# Altium PCB ICEBoard_rev1.0.PcbDoc
Units mil, origin at the board's own origin, x right, y up, seen from the top; angles counter-clockwise.
Board outline 4748.03 x 3751.97 mil, 2 copper layers (Top Layer, Bottom Layer); 41 components, 34 nets, 176 pads, 27 vias.
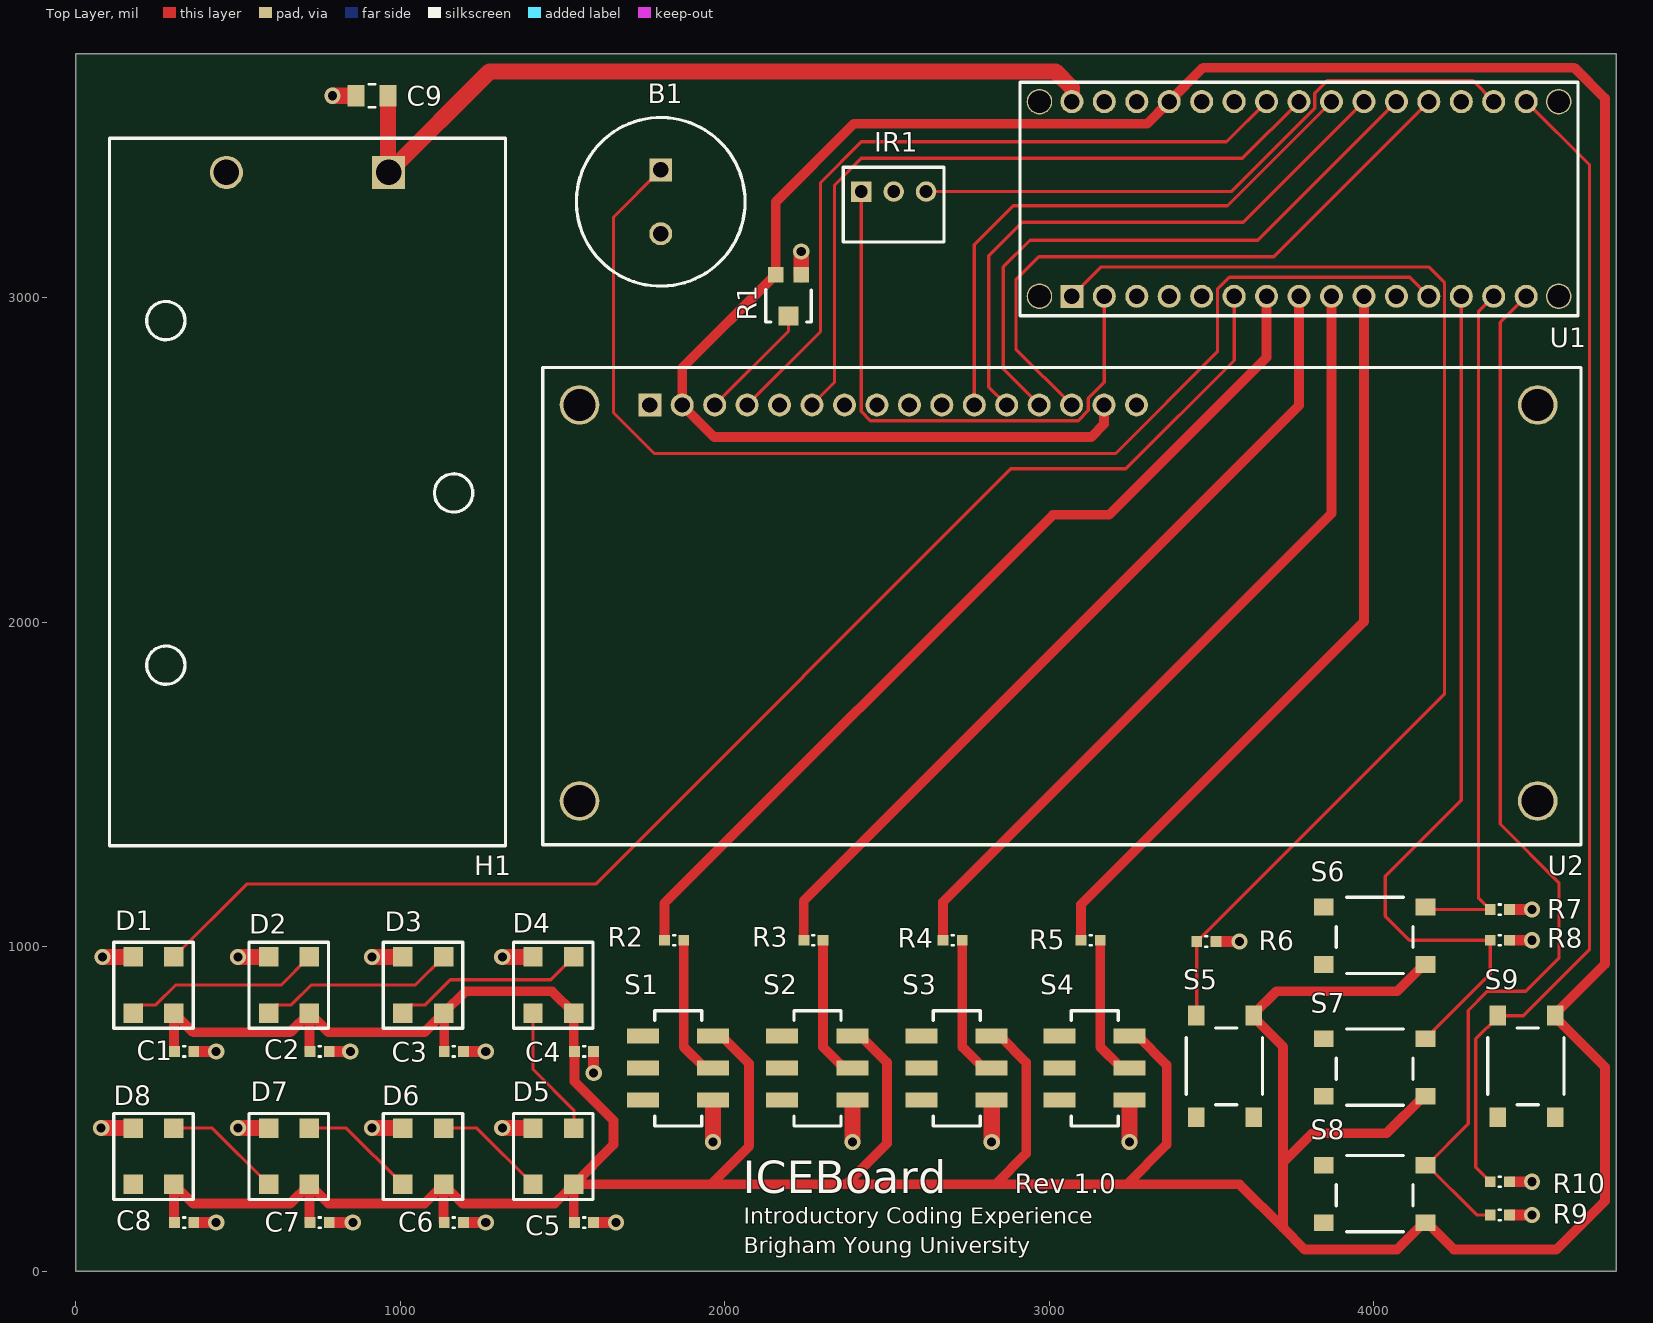
[diagram p0: Top Layer view]
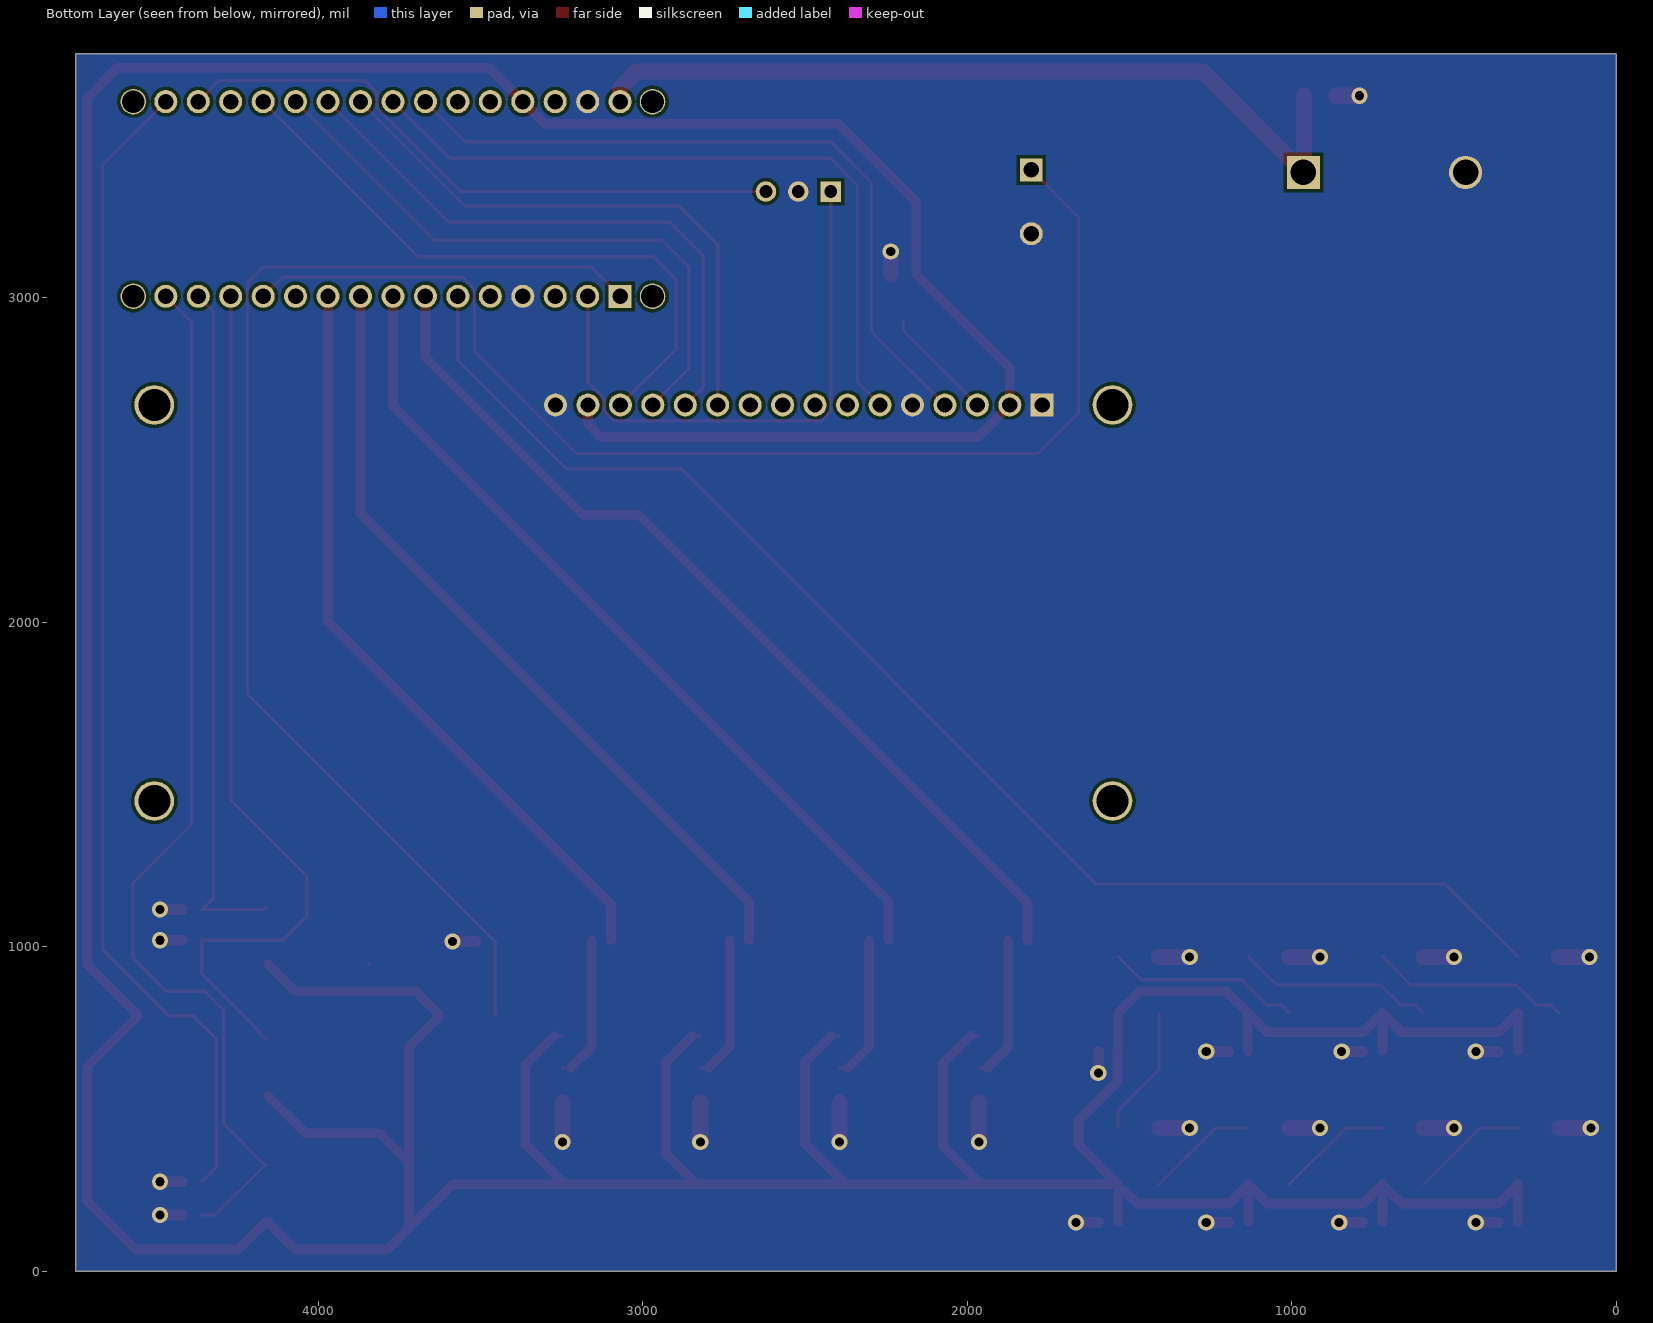
[diagram p1: Bottom Layer view, seen from below]

## Layer stack, top to bottom
Top Solder: solder mask 0.4, Solder Resist, Dk 3.5
Top Layer: signal copper 1.4
Dielectric 1: dielectric 12.6, FR-4, Dk 4.8
Bottom Layer: signal copper 1.4
Bottom Solder: solder mask 0.4, Solder Resist, Dk 3.5

## Board outline
0,0 4748.03,0 4748.03,3751.97 0,3751.97

## Design rules (kind name [scope] priority, off if disabled: settings)
Clearance [All] p1: gap=10 ignorepadtopadclearanceinfootprint=FALSE except(0: Arc-Hole Track-Hole SMDPad-Hole THPad-Hole Via-Hole Fill-Hole Poly-Hole Region-Hole Text-Hole; 8: Arc-THPad Track-THPad)
PolygonConnect [All] p1: connectstyle=Direct reliefconductorwidth=10 reliefentries=4 polygonreliefangle="90 Angle" airgapwidth=10
RoutingVias [All] p1: holewidth=28 width=50 viastyle="Through Hole" minholewidth=28 minwidth=50 maxholewidth=28 maxwidth=50
SolderMaskExpansion [All] p1: expansion=4
UnRoutedNet [All] p1: checkbadconnections=TRUE
Width [All] p1: maxlimit=50 minlimit=10 preferedwidth=10 minimp=50.000000 maximp=50.000000 favimp=50.000000
29 further rules are at their usual default settings.

## Components (designator, comment, footprint, x,y, rotation, side; value= is the part's Value field where it differs from the comment)
B1 "Buzzer" TP124005 1803.15,3393.7 r0 top
C1 "0.1u" CAPACITOR 334.65,677.17 r0 top
C2 "0.1u" CAPACITOR 751.97,677.17 r0 top
C3 "0.1u" CAPACITOR 1165.35,677.17 r0 top
C4 "0.1u" CAPACITOR 1566.93,677.17 r0 top
C5 "0.1u" CAPACITOR 1566.93,149.61 r0 top
C6 "0.1u" CAPACITOR 1165.35,149.61 r0 top
C7 "0.1u" CAPACITOR 751.97,149.61 r0 top
C8 "0.1u" CAPACITOR 334.65,149.61 r0 top
C9 "10u" PCBComponent_1 913.39,3622.05 r180 top
D1 "NeoPixel" NEOPIXEL 177.17,968.5 r270 top
D2 "NeoPixel" NEOPIXEL 594.49,968.5 r270 top
D3 "NeoPixel" NEOPIXEL 1007.87,968.5 r270 top
D4 "NeoPixel" NEOPIXEL 1409.45,968.5 r270 top
D5 "NeoPixel" NEOPIXEL 1409.45,440.94 r270 top
D6 "NeoPixel" NEOPIXEL 1007.87,440.94 r270 top
D7 "NeoPixel" NEOPIXEL 594.49,440.94 r270 top
D8 "NeoPixel" NEOPIXEL 177.17,440.94 r270 top
H1 "Battery Holder" BH9VPC 964.57,3385.83 r90 top
IR1 "IR Receiver" TSOP382 2420.87,3326.77 r90 top
R1 "10k" TC33X 2196.85,3000 r180 top
R2 "100" Resistor1608 1844.49,1019.68 r0 top
R3 "100" Resistor1608 2273.62,1019.68 r0 top
R4 "100" Resistor1608 2702.76,1019.68 r0 top
R5 "100" Resistor1608 3127.95,1019.68 r0 top
R6 "10k" Resistor1608 3484.25,1015.75 r180 top
R7 "10k" Resistor1608 4388.78,1114.17 r180 top
R8 "10k" Resistor1608 4388.78,1019.69 r180 top
R9 "10k" Resistor1608 4388.78,173.23 r180 top
R10 "10k" Resistor1608 4388.78,275.59 r180 top
S1 "Slide Switch" JS202011SCQN 1964.57,527.56 r90 top
S2 "Slide Switch" JS202011SCQN 2393.7,527.56 r90 top
S3 "Slide Switch" JS202011SCQN 2822.83,527.56 r90 top
S4 "Slide Switch" JS202011SCQN 3248.03,527.56 r90 top
S5 "Tactile Switch" PTS645 3452.76,474.41 r90 top
S6 "Tactile Switch" PTS645 3846.46,1122.05 r0 top
S7 "Tactile Switch" PTS645 3846.46,716.54 r0 top
S8 "Tactile Switch" PTS645 3846.46,326.77 r0 top
S9 "Tactile Switch" PTS645 4381.89,474.41 r90 top
U1 "Arduino Nano" ARDUINONANO 3070.08,3003.94 r0 top
U2 "LCD Screen" TC1602A-01T 1769.29,2669.29 r0 top

## Footprints (in the part's own frame and the unit in brackets; to place one, negate y for a bottom-side part, rotate by r counter-clockwise, add the part's x,y. Pads: shape width x height; smd on the part's side, far side on the other; paste and mask are expansions set on the pad)
ARDUINONANO [mm]
  rect 1.8x1.8 hole 1.2: 1(0,0)
  round 1.8 hole 1.2: 2(2.54,0) 3(5.08,0) 4(7.62,0) 5(10.16,0) 6(12.7,0) 7(15.24,0) 8(17.78,0) 9(20.32,0) 10(22.86,0) 11(25.4,0) 12(27.94,0) 13(30.48,0) 14(33.02,0) 15(35.56,0) 16(35.56,15.24) 17(33.02,15.24) 18(30.48,15.24) 19(27.94,15.24) 20(25.4,15.24) 21(22.86,15.24) 22(20.32,15.24) 23(17.78,15.24) 24(15.24,15.24) 25(12.7,15.24) 26(10.16,15.24) 27(7.62,15.24) 28(5.08,15.24) 29(2.54,15.24) 30(0,15.24)
  round 2 hole 1.778: 31(-2.54,15.24) 32(38.1,15.24) 33(38.1,0) 34(-2.54,0)
  silkscreen extent -4.06,-1.52 39.62,16.76, body extent -3.81,-1.14 41.27,16.45, height 8
BH9VPC [mm]
  rect 2.6x2.6 hole 2: 1(0,0)
  round 2.6 hole 2: 2(0,12.7)
  silkscreen extent -52.7,-9.14 2.67,21.84, body extent -52.12,-8.64 2.22,21.34, height 20.62
CAPACITOR [mm]
  rect 0.85x0.85 smd: 1(-0.75,0) 2(0.75,0)
  silkscreen extent -0.08,-0.4 0.08,0.4, body extent -0.85,-0.45 0.85,0.45, height 0.9
JS202011SCQN [mm]
  rect 1.2x2.5 smd: 1(0,0) 2(2.5,0) 3(5,0) 4(0,5.5) 5(2.5,5.5) 6(5,5.5)
  silkscreen extent -2.03,0.89 6.98,4.57, body extent -2,0.95 7,4.55, height 5.5
NEOPIXEL [mil]
  rect 60x60 smd: 1(0,0) 2(0,125.98) 3(173.23,125.98) 4(173.23,0)
  silkscreen extent -45,-60 220,185, body extent -10,-35 185,160, height 63
PCBComponent_1 [mm]
  rect 1.3x1.65 smd: 1(-1.25,0) 2(1.25,0)
  silkscreen extent -0.25,-0.89 0.25,0.89, body extent -1.05,-0.67 1.05,0.68, height 1.35
PTS645 [mm]
  rect 1.55x1.3 smd: 1(0,0) 2(7.95,0) 3(0,-4.5) 4(7.95,-4.5)
  silkscreen extent 0.97,-5.21 6.98,0.76, body extent 0.97,-5.25 6.98,0.75, height 4.3
Resistor1608 [mm]
  rect 0.85x0.85 smd: 1(-0.75,0) 2(0.75,0)
  silkscreen extent -0.08,-0.4 0.08,0.4, body extent -0.8,-0.4 0.8,0.4, height 0.45
TC33X [mm]
  rect 1.2x1.2 smd: 1(-1,-1.8) 3(1,-1.8)
  rect 1.6x1.5 smd: 2(0,1.45)
  silkscreen extent -1.78,-0.63 1.78,1.91, body extent -1.8,-1.91 1.8,2.05, height 1.13
TC1602A-01T [mm]
  rect 1.8x1.8 hole 1.2: 1(0,0)
  round 1.8 hole 1.2: 2(2.54,0) 3(5.08,0) 4(7.62,0) 5(10.16,0) 6(12.7,0) 7(15.24,0) 8(17.78,0) 9(20.32,0) 10(22.86,0) 11(25.4,0) 12(27.94,0) 13(30.48,0) 14(33.02,0) 15(35.56,0) 16(38.1,0)
  round 3.1 hole 2.5: 17(-5.5,0) 18(69.5,0) 19(69.5,-31) 20(-5.5,-31)
  silkscreen extent -8.38,-34.42 72.9,2.92, body extent -8,-34 72.5,2.5, height 13.5
TP124005 [mm]
  rect 1.8x1.8 hole 1.2: 1(0,0)
  round 1.8 hole 1.2: 2(0,-5)
  silkscreen extent -6.6,-9.1 6.6,4.1, body extent -6.2,-8.7 6.2,3.7, height 7.3
TSOP382 [mm]
  rect 1.6x1.6 hole 1: 1(0,0)
  round 1.6 hole 1: 2(0,-2.54) 3(0,-5.08)
  silkscreen extent -3.94,-6.48 1.91,1.4, body extent -3.4,-5.04 1.4,-0.04, height 8.55

## Part data
B1: library part TP124005
C1 C2 C3 C4 C5 C6 C7 C8 C9: library part Capacitor
H1: library part BH9VPC
IR1: library part TSOP382
R1: library part "Resistor - Variable"
R2 R3 R4 R5 R6 R7 R8 R9 R10: library part Resistor
S1 S2 S3 S4: library part JS202011SCQN
S5 S6 S7 S8 S9: library part PTS645
U1: library part ArduinoNano
U2: library part TC1602A-01T

## Via types
v1: diameter 50, hole 28, Top Layer to Bottom Layer, 27 vias

## Nets (pads, with @x,y where several pads share a name; then routed paths per layer and width w, separated by ;. In a path a pad name is that pad's centre, name@x,y a point inside that pad or via, vN(x,y) a via of type N, cw(c..) or ccw(c..) an arc to the next point about the centre after c; other vN are vias at no path point)
+9: C9.1 H1.1 U1.30 | length 2534.8
  Top Layer w10: H1.1@962.6,3387.8 H1.1
  Top Layer w50: H1.1@962.6,3387.8 C9.1 ; H1.1 1275.59,3696.85 3019.69,3696.85 3070.08,3646.46 U1.30
GND: B1.2 C1.2 C2.2 C3.2 C4.2 C5.2 C6.2 C7.2 C8.2 C9.2 D1.1 D2.1 D3.1 D4.1 D5.1 D6.1 D7.1 D8.1 H1.2 IR1.2 R1.1 R6.1 R7.1 R8.1 R9.1 R10.1 S1.1 S2.1 S3.1 S4.1 U1.4 U1.29 U2.1 U2.5 U2.16 | length 2316
  Top Layer w10: D4.1@1405.51,972.44 D4.1 ; S1.1@1964.57,519.68 S1.1 ; S4.1@3248.03,519.68 S4.1 ; R7.1@4417.32,1115.16 R7.1
  Top Layer w33.46: C8.2 v1(433.07,149.61) ; C1.2 v1(433.07,677.17) ; C7.2 v1(854.33,149.61) ; C2.2 v1(846.46,677.17) ; C6.2 v1(1263.78,149.61) ; C3.2 v1(1263.78,677.17) ; C5.2 v1(1665.35,149.61) ; v1(1596.46,610.24) C4.2 ; R6.1 v1(3586.61,1015.75) ; R9.1 v1(4488.19,173.23) ; R10.1 v1(4488.19,275.59) ; R8.1 v1(4488.19,1019.68) ; R7.1 v1(4488.19,1114.17)
  Top Layer w47.24: R1.1 v1(2236.22,3141.73)
  Top Layer w50: v1(78.74,440.94) D8.1 ; v1(82.68,968.5) D1.1 ; v1(500,440.94) D7.1 ; v1(500,968.5) D2.1 ; v1(791.34,3622.05) C9.2 ; v1(913.39,440.94) D6.1 ; v1(913.39,968.5) D3.1 ; v1(1314.96,440.94) D5.1 ; v1(1314.96,968.5) D4.1 ; v1(1964.57,397.64) S1.1@1964.57,519.68 ; v1(2393.7,397.64) S2.1@2393.7,519.68 ; v1(2822.83,397.64) S3.1@2822.83,519.68 ; v1(3248.02,397.64) S4.1@3248.02,519.68
NetB1_1: B1.1 U1.12 | length 3735.5
  Top Layer w10: B1.1 1657.48,3248.03 1657.48,2645.67 1783.46,2519.68 3204.72,2519.68 3518.51,2833.47 3518.51,3026.07 3555.43,3062.99 4111.02,3062.99 U1.12
NetC1_1: C1.1 C2.1 C3.1 C4.1 C5.1 C6.1 C7.1 C8.1 D1.3 D2.3 D3.3 D4.3 D5.3 D6.3 D7.3 D8.3 R1.3 S1.3 S2.3 S3.3 S4.3 S5.4 S6.4 S7.4 S8.4 S9.4 U1.27 U2.2 U2.15 | length 20141.4
  Top Layer w10: C8.1@303.15,151.57 C8.1 C8.1@309.65,154.13 ; C1.1@303.15,679.13 C1.1 ; C2.1@720.47,679.13 C2.1 ; C6.1@1133.86,151.57 C6.1 ; D3.3 D3.3@1135.83,793.31 ; D5.3@1513.78,246.06 D5.3 ; C5.1@1535.43,151.57 C5.1 ; C4.1@1535.43,679.13 C4.1 ; 1960.63,267.72 1960.63,270.39 ; S1.3 S1.3@1990.16,724.41 ; S2.3 S2.3@2419.29,724.41 ; S3.3 S3.3@2848.43,724.41 ; S4.3 S4.3@3273.62,724.41 ; S8.4@4154.53,149.61 S8.4 S8.4@4164.37,149.61 ; S7.4@4154.53,539.37 S7.4 ; S6.4@4154.53,944.88 S6.4 ; S9.4@4559.06,782.48 S9.4 S9.4@4559.06,792.32
  Top Layer w30: C8.1@303.15,151.57 D8.3 362.2,208.66 661.42,208.66 D7.3 ; C1.1@303.15,679.13 D1.3 362.2,736.22 661.42,736.22 D2.3 ; C7.1@720.47,151.57 D7.3 ; C2.1@720.47,679.13 D2.3 ; C6.1@1133.86,151.57 D6.3 ; C3.1 D3.3@1135.83,793.31 ; D5.3@1513.78,246.06 1476.38,208.66 1192.91,208.66 D6.3 ; C5.1@1535.43,151.57 D5.3 ; C4.1@1535.43,679.13 D4.3 1468.5,862.2 1200.79,862.2 D3.3 1074.8,736.22 779.53,736.22 D2.3 ; C4.1 1537.4,584.65 1657.48,464.57 1657.48,389.76 D5.3 ; 1960.63,270.39 2074.8,384.57 2074.8,639.76 S1.3@1990.16,724.41 ; S2.3@2419.29,724.41 2500,643.7 2500,393.7 2374.02,267.72 ; S3.3@2848.43,724.41 2929.13,643.7 2929.13,362.2 2834.65,267.72 ; U2.15 3169.29,2610.24 3129.92,2570.87 1967.72,2570.87 U2.2 1869.29,2782.68 R1.3 2157.48,3295.28 2397.64,3535.43 3301.57,3535.43 U1.27 3474.8,3708.66 4618.11,3708.66 4712.6,3614.17 4712.6,945.87 S9.4@4559.06,792.32 ; S4.3@3273.62,724.41 3362.2,635.83 3362.2,389.76 3240.16,267.72 ; S8.4@4154.53,149.61 4071.85,66.93 3787.4,66.93 3720.47,133.86 ; S7.4@4154.53,539.37 4040.35,425.2 3811.02,425.2 3720.47,334.65 ; S6.4@4154.53,944.88 4071.85,862.2 3699.8,862.2 3629.92,792.32 S5.4 3629.92,782.48 3720.47,691.93 3720.47,334.65 ; S8.4@4164.37,149.61 4247.05,66.93 4562.99,66.93 4712.6,216.54 4712.6,628.94 S9.4@4559.06,782.48 ; D7.3 779.53,208.66 1074.8,208.66 D6.3 ; D5.3 1960.63,267.72 2374.02,267.72 ; 2374.02,267.72 2834.65,267.72 ; 2834.65,267.72 3240.16,267.72 ; 3240.16,267.72 3586.61,267.72 3720.47,133.86 ; 3720.47,133.86 3720.47,334.65
NetD1_2: D1.2 U1.6 | length 4225.8
  Top Layer w10: D1.2 527.56,1192.91 1602.36,1192.91 2881.89,2472.44 3236.22,2472.44 3570.08,2806.3 U1.6
NetD1_4: D1.4 D2.2 | length 615.1
  Top Layer w10: D1.4 202.17,820.28 246.94,820.28 308.55,881.89 633.86,881.89 D2.2
NetD2_4: D2.4 D3.2 | length 611.1
  Top Layer w10: D2.4 619.49,820.28 664.26,820.28 725.87,881.89 1047.24,881.89 D3.2
NetD3_4: D3.4 D4.2 | length 599.3
  Top Layer w10: D3.4 1032.87,820.28 1077.65,820.28 1155.01,897.64 1464.57,897.64 D4.2
NetD4_4: D4.4 D5.2 | length 406.5
  Top Layer w10: D4.4 1409.45,622.05 1535.43,496.06 D5.2
NetD5_4: D5.4 D6.2 | length 347.3
  Top Layer w10: D6.2 1236.22,440.94 D5.4
NetD6_4: D6.4 D7.2 | length 359.2
  Top Layer w10: D7.2 834.65,440.94 D6.4
NetD7_4: D7.4 D8.2 | length 363.1
  Top Layer w10: D8.2 421.26,440.94 D7.4
NetIR1_1: IR1.1 U1.2 | length 1774.3
  Top Layer w10: IR1.1 2420.87,3011.82 2420.86,2649.23 2449.23,2620.86 3089.36,2620.86 3120.86,2652.35 3120.86,2689.35 3170.08,2738.57 U1.2
NetIR1_3: IR1.3 U1.17 | length 1944.9
  Top Layer w10: IR1.3 3561.41,3326.77 3818.51,3583.88 3818.51,3629.54 3858.27,3669.29 4304.72,3669.29 U1.17
NetR1_2: R1.2 U2.3 | length 356.1
  Top Layer w10: U2.3 2196.85,2896.85 R1.2@2196.85,2931.1
NetR2_1: R2.1 U1.7 | length 2854.1
  Top Layer w30: R2.1 1814.96,1133.86 3011.81,2330.71 3185.04,2330.71 3670.08,2815.75 U1.7
NetR2_2: R2.2 S1.2 | length 446.2
  Top Layer w10: S1.2@1938.98,625.98 S1.2
  Top Layer w30: R2.2 1874.02,717.74 1874.02,690.94 S1.2@1938.98,625.98
NetR3_1: R3.1 U1.8 | length 2616.3
  Top Layer w30: R3.1 2244.09,1141.73 3770.08,2667.72 U1.8
NetR3_2: R3.2 S2.2 | length 446.2
  Top Layer w10: S2.2@2368.11,625.98 S2.2
  Top Layer w30: R3.2 2303.15,690.94 S2.2@2368.11,625.98
NetR4_1: R4.1 U1.9 | length 2480
  Top Layer w30: R4.1 2673.23,1137.8 3870.08,2334.65 U1.9
NetR4_2: R4.2 S3.2 | length 446.2
  Top Layer w10: S3.2@2797.24,625.98 S3.2
  Top Layer w30: R4.2 2732.28,690.94 S3.2@2797.24,625.98
NetR5_1: R5.1 U1.10 | length 2345.3
  Top Layer w30: R5.1 3098.43,1129.92 3970.08,2001.57 U1.10
NetR5_2: R5.2 S4.2 | length 446.2
  Top Layer w10: S4.2@3222.44,625.98 S4.2
  Top Layer w30: R5.2 3157.48,690.94 S4.2@3222.44,625.98
NetR6_2: R6.2 S5.2 U1.1 | length 3781.4
  Top Layer w10: U1.1 3160.63,3094.49 4169.29,3094.49 4218.51,3045.27 4218.51,1779.54 R6.2 3454.72,789.37 S5.2
NetR7_2: R7.2 S6.2 U1.14 | length 2127.5
  Top Layer w10: S6.2 4167.32,1114.17 R7.2 4322.83,1150.59 4322.83,2956.69 U1.14
NetR8_2: R8.2 S7.2 U1.13 | length 2750.1
  Top Layer w10: S7.2 4164.37,716.54 4184.96,737.13 4184.96,742.05 4359.25,916.34 R8.2 4110.24,1019.69 4035.64,1094.28 4035.64,1216.74 4270.08,1451.18 U1.13
NetR9_2: R9.2 S8.2 U1.15 | length 3286.4
  Top Layer w10: S8.2 S8.2@4164.37,326.77 ; R9.2 4317.91,173.23 S8.2@4164.37,326.77 ; U1.15 4389.76,2923.62 4389.76,1377.95 4570.87,1196.85 4570.87,964.57 4468.5,862.2 4350.39,862.2 4291.34,803.15 4291.34,453.74 S8.2@4164.37,326.77
NetR10_2: R10.2 S9.2 U1.16 | length 3618.8
  Top Layer w10: R10.2 4314.96,319.88 4314.96,715.55 4381.89,782.48 S9.2 4460.63,787.4 4665.35,992.13 4665.35,3408.66 U1.16
NetU1_19: U1.19 U2.14 | length 1956.7
  Top Layer w10: U2.14 2897.64,2840.95 2897.64,3055.12 2968.5,3125.98 3692.13,3125.98 U1.19
NetU1_20: U1.20 U2.13 | length 1894
  Top Layer w10: U2.13 2858.27,2780.32 2858.27,3094.49 2940.94,3177.17 3643.31,3177.17 U1.20
NetU1_21: U1.21 U2.12 | length 1835.2
  Top Layer w10: U2.12 2814.17,2724.41 2814.17,3129.13 2917.32,3232.28 3598.43,3232.28 U1.21
NetU1_22: U1.22 U2.11 | length 1777.1
  Top Layer w10: U2.11 2769.29,3162.99 2889.76,3283.46 3549.61,3283.46 U1.22
NetU1_23: U1.23 U2.6 | length 2244
  Top Layer w10: U2.6 2338.58,2738.58 2338.58,3346.46 2421.26,3429.13 3595.28,3429.13 U1.23
NetU1_24: U1.24 U2.4 | length 2256.8
  Top Layer w10: U2.4 2295.48,2895.48 2295.48,3354.54 2421.26,3480.31 3546.46,3480.31 U1.24
pads on no net: D8.4 S1.4 S1.5 S1.6 S2.4 S2.5 S2.6 S3.4 S3.5 S3.6 S4.4 S4.5 S4.6 S5.1 S5.3 S6.1 S6.3 S7.1 S7.3 S8.1 S8.3 S9.1 S9.3 U1.3 U1.5 U1.11 U1.18 U1.25 U1.26 U1.28 U1.31 U1.32 U1.33 U1.34 U2.7 U2.8 U2.9 U2.10 U2.17 U2.18 U2.19 U2.20
copper on no net: | length 4.9
  Top Layer w10: 3841.54,944.88 3846.46,944.88

## Polygon pours and split planes (outlines as drawn)
GND on Bottom Layer "Bottom Layer-GND" (solid, pour order 0): 0,3751.97 -0.02,0 4748.03,0 4748.03,3751.97

## Silkscreen, mask and mechanical layers (free items; w line width, h text height)
Top Overlay:
  text "ICEBoard" at 2055.12,240.16 h100
  text "Rev 1.0" at 2893.7,240.16 h60
  text "Introductory Coding Experience" at 2059.06,145.67 h50
  text "Brigham Young University" at 2059.06,55.12 h50
Mechanical 4 (Mech4):
  lines w10: 0,0 4750,0 4750,3750 0,3750 0,0